# Altium PCB CardV1-ASCII.PcbDoc
Units mil, origin at the board's own origin, x right, y up, seen from the top; angles counter-clockwise.
Board outline 1590.03 x 1355.03 mil, 2 copper layers (Top Layer, Bottom Layer); 45 components, 56 nets, 174 pads, 11 vias.
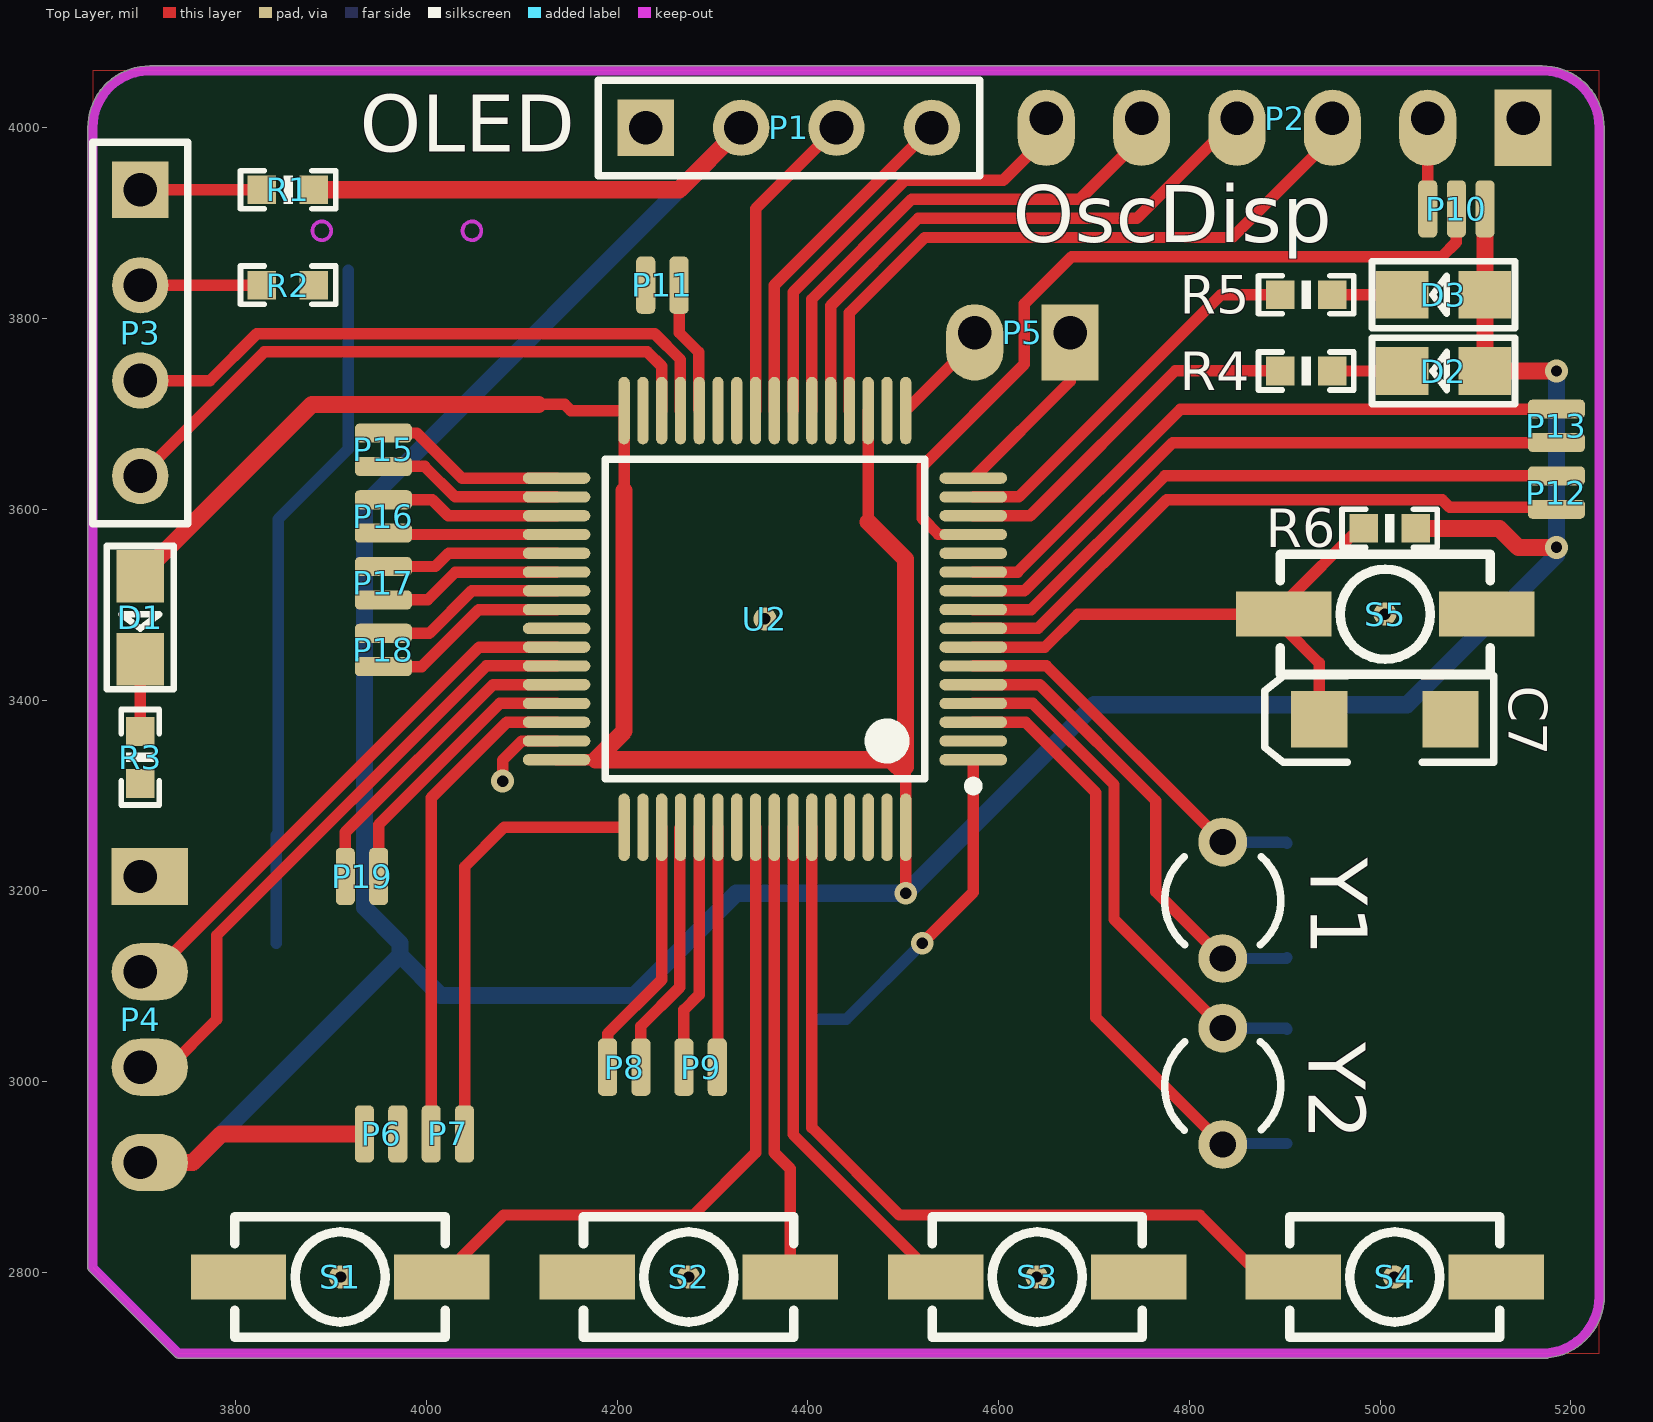
[diagram p0: Top Layer view]
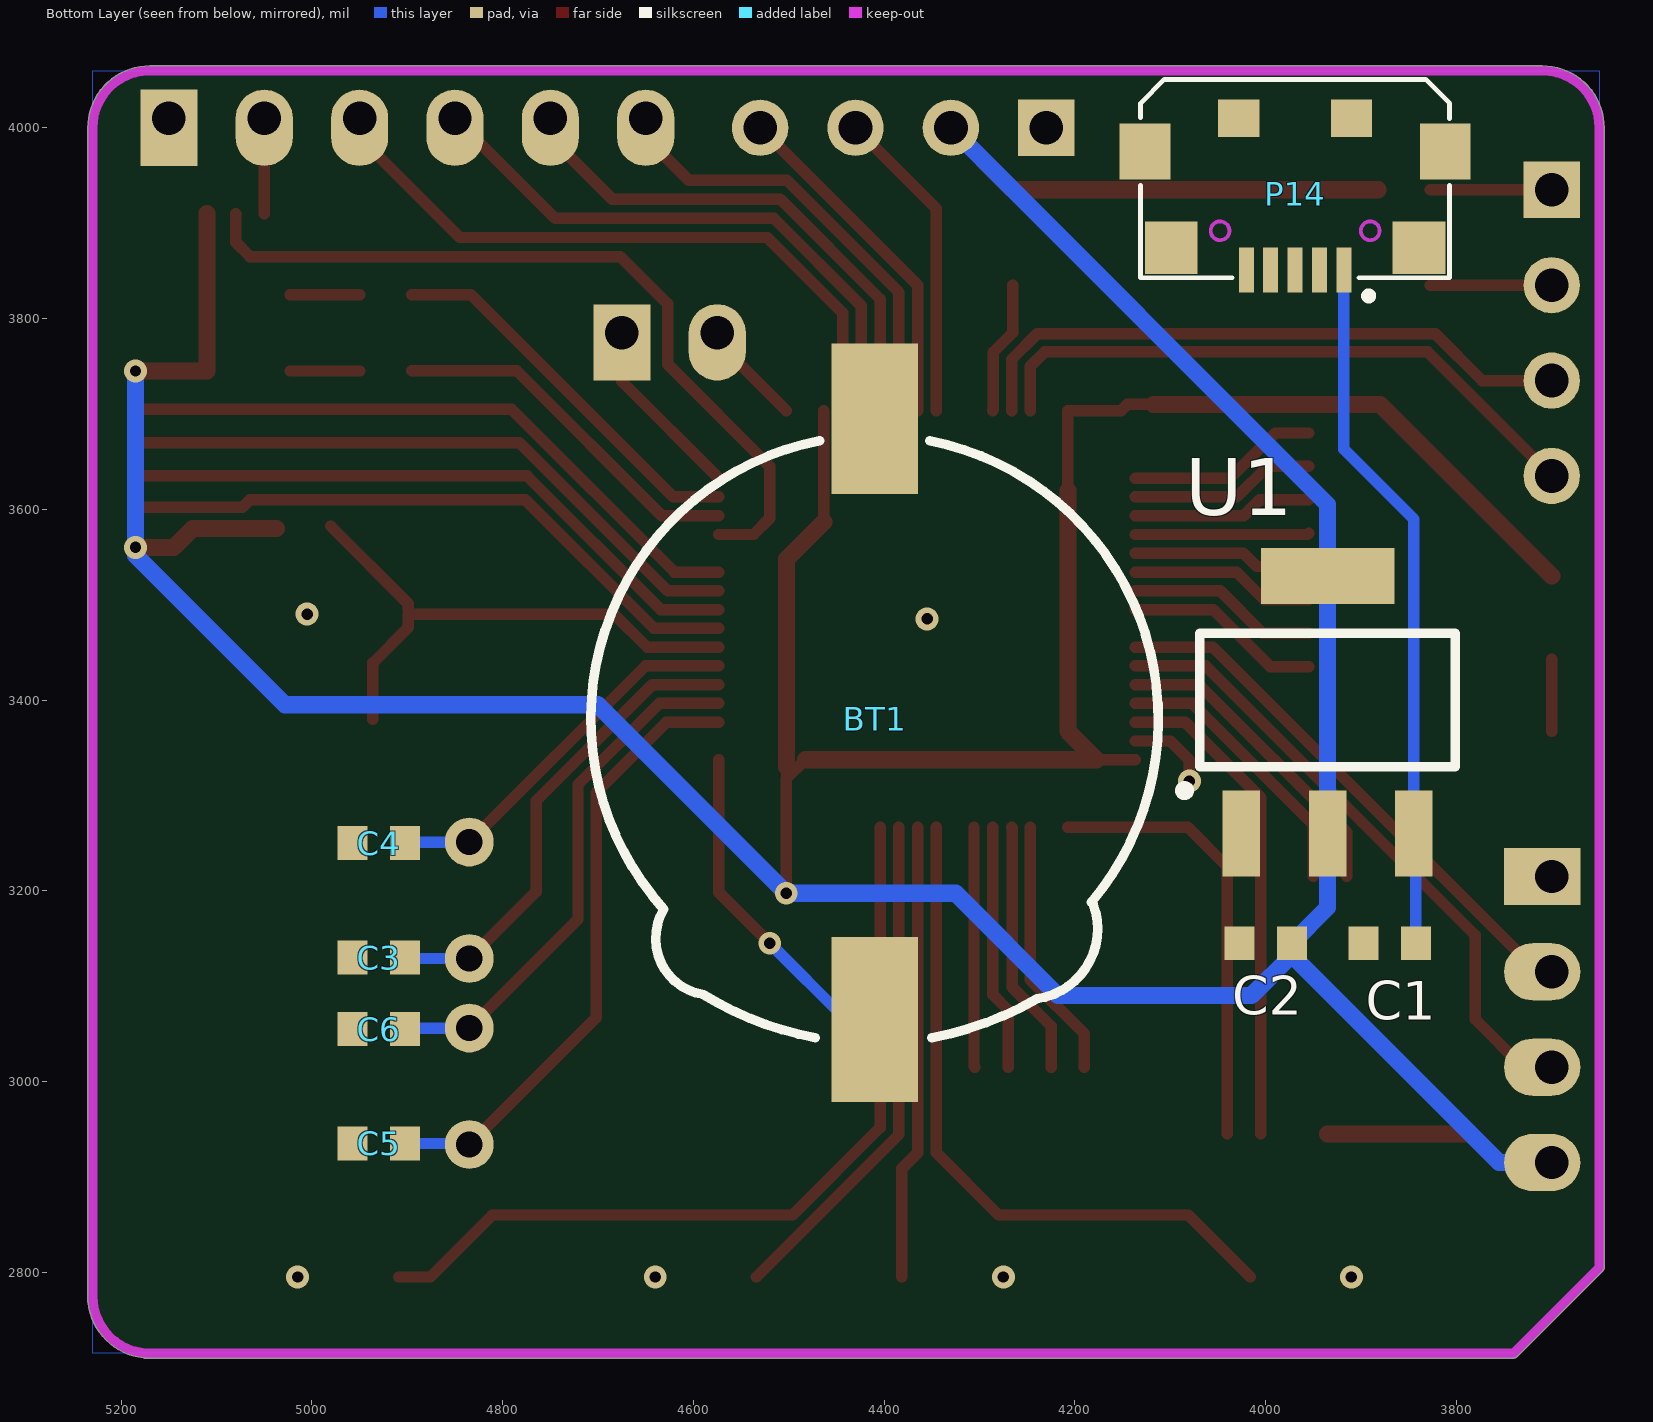
[diagram p1: Bottom Layer view, seen from below]

## Layer stack, top to bottom
Top Solder: solder mask 0.4, Solder Resist, Dk 3.5
Top Layer: signal copper 1.4
Dielectric 1: dielectric 12.6, FR-4, Dk 4.8
Bottom Layer: signal copper 1.4
Bottom Solder: solder mask 0.4, Solder Resist, Dk 3.5

## Board outline
3646.47,2801.44 cw(c3650,2805) 3644.99,2805 3644.99,4000 cw(c3710,4000) 3710,4065.01 5170,4065.01 cw(c5170,4000) 5235.02,4000 5235.02,2770 cw(c5230,2770) 5234.65,2768.12 cw(c5170,2775) 5176.88,2710.35 cw(c5175,2715) 5175,2709.99 3740,2709.99 cw(c3740,2715) 3736.44,2711.47 3736.45,2711.45

## Design rules (kind name [scope] priority, off if disabled: settings)
AssemblyTestPointUsage [All] p0: scope1count=1 scope1_0_kind=Board scope1_0_value=Board scope2count=1 scope2_0_kind=Board scope2_0_value=Board commentlength=0
AssemblyTestpoint [All] p0: scope1count=1 scope1_0_kind=Board scope1_0_value=Board scope2count=1 scope2_0_kind=Board scope2_0_value=Board commentlength=0
Clearance [All] p0: scope1count=1 scope1_0_kind=Board scope1_0_value=Board scope2count=1 scope2_0_kind=Board scope2_0_value=Board commentlength=0 gap=7
Clearance [All] p1: gap=7 ignorepadtopadclearanceinfootprint=FALSE
ComponentClearance [All] p0: scope1count=1 scope1_0_kind=Board scope1_0_value=Board scope2count=1 scope2_0_kind=Board scope2_0_value=Board commentlength=0 gap=10 collisioncheckmode=3
DiffPairsRouting [All] p0: scope1count=1 scope1_0_kind=Board scope1_0_value=Board scope2count=1 scope2_0_kind=Board scope2_0_value=Board commentlength=0
FabricationTestPointUsage [All] p0: scope1count=1 scope1_0_kind=Board scope1_0_value=Board scope2count=1 scope2_0_kind=Board scope2_0_value=Board commentlength=0 valid=0 allowmultiple=FALSE
FabricationTestpoint [All] p0: scope1count=1 scope1_0_kind=Board scope1_0_value=Board scope2count=1 scope2_0_kind=Board scope2_0_value=Board commentlength=0 side=3 testpointundercomponent=TRUE minsize=40 maxsize=100 preferedsize=60 minholesize=0 maxholesize=40 preferedholesize=32 testpointgrid=1
FanoutControl Fanout_Default [All] p0: scope1count=1 scope1_0_kind=Board scope1_0_value=Board scope2count=1 scope2_0_kind=Board scope2_0_value=Board commentlength=30 // Fanout_Default (Default Rule)
FanoutControl Fanout_Small [All] p0 off: scope1count=1 scope1_0_kind=Board scope1_0_value=Board scope2count=1 scope2_0_kind=Board scope2_0_value=Board commentlength=84 // Protel DXP Scope 1 Expression Was: (CompPinCount < 5)   Fanout_Small (Default Rule)
FanoutControl Fanout_SOIC [All] p0 off: scope1count=1 scope1_0_kind=Board scope1_0_value=Board scope2count=1 scope2_0_kind=Board scope2_0_value=Board commentlength=71 // Protel DXP Scope 1 Expression Was: IsSOIC   Fanout_SOIC (Default Rule)
FanoutControl Fanout_LCC [All] p0 off: scope1count=1 scope1_0_kind=Board scope1_0_value=Board scope2count=1 scope2_0_kind=Board scope2_0_value=Board commentlength=69 // Protel DXP Scope 1 Expression Was: IsLCC   Fanout_LCC (Default Rule)
FanoutControl Fanout_BGA [All] p0 off: scope1count=1 scope1_0_kind=Board scope1_0_value=Board scope2count=1 scope2_0_kind=Board scope2_0_value=Board commentlength=69 // Protel DXP Scope 1 Expression Was: IsBGA   Fanout_BGA (Default Rule)
Height [All] p0: scope1count=1 scope1_0_kind=Board scope1_0_value=Board scope2count=1 scope2_0_kind=Board scope2_0_value=Board commentlength=0
HoleSize [All] p0: scope1count=1 scope1_0_kind=Board scope1_0_value=Board scope2count=1 scope2_0_kind=Board scope2_0_value=Board commentlength=0 absolutevalues=TRUE maxlimit=100 minlimit=1 maxpercent=80.000 minpercent=20.000
HoleToHoleClearance [All] p0: scope1count=1 scope1_0_kind=Board scope1_0_value=Board scope2count=1 scope2_0_kind=Board scope2_0_value=Board commentlength=0
HoleToHoleClearance [All] p1: gap=7 allowstackedmicrovias=TRUE
LayerPairs [All] p0: scope1count=1 scope1_0_kind=Board scope1_0_value=Board scope2count=1 scope2_0_kind=Board scope2_0_value=Board commentlength=0 enforce=TRUE
MinimumSolderMaskSliver [All] p0: scope1count=1 scope1_0_kind=Board scope1_0_value=Board scope2count=1 scope2_0_kind=Board scope2_0_value=Board commentlength=0
MinimumSolderMaskSliver [All] p1: minsoldermaskwidth=7
NetAntennae [All] p0: scope1count=1 scope1_0_kind=Board scope1_0_value=Board scope2count=1 scope2_0_kind=Board scope2_0_value=Board commentlength=0
PasteMaskExpansion [All] p0: scope1count=1 scope1_0_kind=Board scope1_0_value=Board scope2count=1 scope2_0_kind=Board scope2_0_value=Board commentlength=0 expansion=0
PlaneClearance [All] p0: scope1count=1 scope1_0_kind=Board scope1_0_value=Board scope2count=1 scope2_0_kind=Board scope2_0_value=Board commentlength=0 clearance=20
PlaneConnect [All] p0: scope1count=1 scope1_0_kind=Board scope1_0_value=Board scope2count=1 scope2_0_kind=Board scope2_0_value=Board commentlength=0 planeconnectstyle=Relief reliefexpansion=20 reliefentries=4 reliefconductorwidth=10 reliefairgap=10
PolygonConnect [All] p0: scope1count=1 scope1_0_kind=Board scope1_0_value=Board scope2count=1 scope2_0_kind=Board scope2_0_value=Board commentlength=0 connectstyle=Relief reliefconductorwidth=10 reliefentries=4 polygonreliefangle="90 Angle"
PolygonConnect [All] p1: connectstyle=Relief reliefconductorwidth=10 reliefentries=4 polygonreliefangle="90 Angle" airgapwidth=10
RoutingCorners [All] p0: scope1count=1 scope1_0_kind=Board scope1_0_value=Board scope2count=1 scope2_0_kind=Board scope2_0_value=Board commentlength=0 cornerstyle=45-Degree minsetback=100 maxsetback=100
RoutingLayers [All] p0: scope1count=1 scope1_0_kind=Board scope1_0_value=Board scope2count=1 scope2_0_kind=Board scope2_0_value=Board commentlength=0 top layer=Automatic bottom layer=Automatic
RoutingPriority [All] p0: scope1count=1 scope1_0_kind=Board scope1_0_value=Board scope2count=1 scope2_0_kind=Board scope2_0_value=Board commentlength=0
RoutingTopology [All] p0: scope1count=1 scope1_0_kind=Board scope1_0_value=Board scope2count=1 scope2_0_kind=Board scope2_0_value=Board commentlength=0 topology=Shortest
RoutingVias [All] p0: scope1count=1 scope1_0_kind=Board scope1_0_value=Board scope2count=1 scope2_0_kind=Board scope2_0_value=Board commentlength=0 holewidth=12 width=24 viastyle="Through Hole" minholewidth=7 minwidth=18 maxholewidth=15 maxwidth=30
RoutingVias [All] p1: holewidth=12 width=24 viastyle="Through Hole" minholewidth=7 minwidth=18 maxholewidth=15 maxwidth=30
ShortCircuit [All] p0: scope1count=1 scope1_0_kind=Board scope1_0_value=Board scope2count=1 scope2_0_kind=Board scope2_0_value=Board commentlength=0 allowed=FALSE
SilkToBoardRegionClearance [All] p0: scope1count=1 scope1_0_kind=Board scope1_0_value=Board scope2count=1 scope2_0_kind=Board scope2_0_value=Board commentlength=0
SilkToSilkClearance [All] p0: scope1count=1 scope1_0_kind=Board scope1_0_value=Board scope2count=1 scope2_0_kind=Board scope2_0_value=Board commentlength=0
SilkToSilkClearance [All] p1: silktosilkclearance=0
SilkToSolderMaskClearance [All] p0 off: scope1count=1 scope1_0_kind=Board scope1_0_value=Board scope2count=1 scope2_0_kind=Board scope2_0_value=Board commentlength=44 // Protel DXP Scope 1 Expression Was: IsPad
SilkToSolderMaskClearance [IsPad] p1: minsilkscreentomaskgap=0 clearancetoexposedcopper=TRUE
SolderMaskExpansion [All] p0: scope1count=1 scope1_0_kind=Board scope1_0_value=Board scope2count=1 scope2_0_kind=Board scope2_0_value=Board commentlength=0 expansion=4
SolderMaskExpansion [All] p1: expansion=4
UnRoutedNet [All] p0: scope1count=1 scope1_0_kind=Board scope1_0_value=Board scope2count=1 scope2_0_kind=Board scope2_0_value=Board commentlength=0
UnpouredPolygon [All] p0: scope1count=1 scope1_0_kind=Board scope1_0_value=Board scope2count=1 scope2_0_kind=Board scope2_0_value=Board commentlength=0
Width [All] p0: scope1count=1 scope1_0_kind=Board scope1_0_value=Board scope2count=1 scope2_0_kind=Board scope2_0_value=Board commentlength=0 maxlimit=20 minlimit=7 preferedwidth=12
Width [All] p1: maxlimit=20 minlimit=7 preferedwidth=12
26 further rules are at their usual default settings.

## Components (designator, comment, footprint, x,y, rotation, side; value= is the part's Value field where it differs from the comment)
BT1 "Battery" Battery-OneSide 4410,3380 r270 bottom
C1 "100u" 1608[0603] 3870,3145 r180 bottom
C2 "100u" 1608[0603] 4000,3145 r180 bottom
C3 "22" 1608[0603] 4930,3130 r0 bottom
C4 "22" 1608[0603] 4930,3250 r180 bottom
C5 "22" 1608[0603] 4930,2935 r0 bottom
C6 "22" 1608[0603] 4930,3055 r0 bottom
C7 "104" 3.2X1.6X1.1 5005,3380 r180 top
D1 "LED0" SMDLED 3700,3530 r270 top
D2 "LED1" SMDLED 5110.03,3744.94 r180 top
D3 "LED2" SMDLED 5110.03,3824.94 r180 top
P1 "OLED" HDR1X4 4230,4000 r0 top
P2 "OscDisp" POSTAGE6 5150,4010 r180 top
P3 "Header 4" HDR1X4 3700,3935 r270 top
P4 "USART1" POSTAGE4 3700,3215 r270 top
P5 "USART2" POSTAGE2 4675,3785 r180 top
P6 "Boot" Switch2 3970,2945 r180 top
P7 "Boot" Switch2 4005,2945 r0 top
P8 "Boot" Switch2 4190,3015 r0 top
P9 "Boot" Switch2 4270,3015 r0 top
P10 "VrefCon" SWITCH3 5080,3915 r0 top
P11 "Boot" SWITCH2 4265,3835 r180 top
P12 "Boot" Switch2 5185,3600 r90 top
P13 "Boot" Switch2 5185,3670 r90 top
P14 "MICRO-USB" MICRO_USB5P_SOP 3969.05,3850.71 r180 bottom
P15 "Boot" Switch2 3955,3680 r270 top
P16 "Boot" Switch2 3955,3610 r270 top
P17 "Boot" Switch2 3955,3540 r270 top
P18 "Boot" Switch2 3955,3470 r270 top
P19 "Boot" Switch2 3915,3215 r0 top
R1 "0" 0603P 3855,3935 r180 top
R2 "0" 0603P 3855,3835 r180 top
R3 "330" 0603P 3700,3340 r270 top
R4 "330" 0603P 4922.5,3745.06 r0 top
R5 "330" 0603P 4922.5,3825 r0 top
R6 "10K" 0603P 5010,3580 r0 top
S1 "SW0" KEY 3910,2795 r0 top
S2 "SW1" KEY 4275.47,2795 r0 top
S3 "SW2" KEY 4640,2795 r180 top
S4 "SW3" KEY 5015,2795 r180 top
S5 "Reset" Key 5005,3490 r180 top
U1 "1117B" SOP-223 3935,3530 r180 bottom
U2 "STM32F103RBT6" LQFP64_N 4355,3485 r180 top
Y1 "8M" R38 4835,3190 r0 top
Y2 "32.768K" R38 4835,2995 r180 top

## Footprints (in the part's own frame and the unit in brackets; to place one, negate y for a bottom-side part, rotate by r counter-clockwise, add the part's x,y. Pads: shape width x height; smd on the part's side, far side on the other; paste and mask are expansions set on the pad)
3.2X1.6X1.1 [mm] "SMT LED; 2 Flat Leads"
  rect 1.5x1.5 smd: 1(-1.75,0) 2(1.75,0)
  silkscreen extent -2.9,-1.15 3.2,1.15
0603P [mil]
  rect 30x30 smd: 1(-27,0) 2(27.5,-0.06)
  silkscreen extent -50,-20 50,20
1608[0603] [mm] "Chip Capacitor, Body 1.6x0.8mm, IPC High Density"
  rect 0.8x0.9 smd: 1(-0.7,0) 2(0.7,0)
Battery-OneSide [mm]
  rect 4.4x2.3 smd: 1(8,0)
  rect 4x2.3 smd: 2(-8,0)
  silkscreen extent -7.41,-7.56 8.48,7.56
HDR1X4 [mm] "Connector; Header; 4 Position"
  rect 1.5x1.5 hole 0.9: 1(0,0)
  round 1.5 hole 0.9: 2(2.54,0) 3(5.08,0) 4(7.62,0)
  silkscreen extent -1.27,-1.27 8.89,1.27
KEY [mil]
  rect 100x47.24 smd: 1(-106.95,0) 2(106.03,0)
  silkscreen extent -111,-63 110,63
Key [mil]
  rect 100x47.24 smd: 1(-106.96,0) 2(106.02,0)
  silkscreen extent -111,-63 110,63
LQFP64_N [mm] "Thin QFP, 64-Leads, Body 10x10mm, Pitch 0.5mm, IPC Medium Density"
  oval 1.8x0.3 smd: 1(-5.55,3.75) 2(-5.55,3.25) 3(-5.55,2.75) 4(-5.55,2.25) 5(-5.55,1.75) 6(-5.55,1.25) 7(-5.55,0.75) 8(-5.55,0.25) 9(-5.55,-0.25) 10(-5.55,-0.75) 11(-5.55,-1.25) 12(-5.55,-1.75) 13(-5.55,-2.25) 14(-5.55,-2.75) 15(-5.55,-3.25) 16(-5.55,-3.75) 33(5.55,-3.75) 34(5.55,-3.25) 35(5.55,-2.75) 36(5.55,-2.25) 37(5.55,-1.75) 38(5.55,-1.25) 39(5.55,-0.75) 40(5.55,-0.25) 41(5.55,0.25) 42(5.55,0.75) 43(5.55,1.25) 44(5.55,1.75) 45(5.55,2.25) 46(5.55,2.75) 47(5.55,3.25) 48(5.55,3.75)
  oval 0.3x1.8 smd: 17(-3.75,-5.55) 18(-3.25,-5.55) 19(-2.75,-5.55) 20(-2.25,-5.55) 21(-1.75,-5.55) 22(-1.25,-5.55) 23(-0.75,-5.55) 24(-0.25,-5.55) 25(0.25,-5.55) 26(0.75,-5.55) 27(1.25,-5.55) 28(1.75,-5.55) 29(2.25,-5.55) 30(2.75,-5.55) 31(3.25,-5.55) 32(3.75,-5.55) 49(3.75,5.55) 50(3.25,5.55) 51(2.75,5.55) 52(2.25,5.55) 53(1.75,5.55) 54(1.25,5.55) 55(0.75,5.55) 56(0.25,5.55) 57(-0.25,5.55) 58(-0.75,5.55) 59(-1.25,5.55) 60(-1.75,5.55) 61(-2.25,5.55) 62(-2.75,5.55) 63(-3.25,5.55) 64(-3.75,5.55)
  silkscreen extent -5.68,-4.25 4.25,4.57
MICRO_USB5P_SOP [mm]
  rect 1.35x1.5 smd: 0(-4,3.16) 0(4,3.16)
  rect 1.4x1.4 smd: 0(-3.3,0.6) 0(3.3,0.6)
  rect 1.1x1 smd: 0(-1.5,4.046) 0(1.5,4.046)
  rect 0.4x1.2 smd: 1(1.3,0) 2(0.65,0) 3(0,0) 4(-0.65,0) 5(-1.3,0)
  Keep-Out Layer circle w0.1: c2,1.05 r0.25
  Keep-Out Layer circle w0.1: c-2,1.05 r0.25
  silkscreen extent -4.11,-0.79 4.11,5.08
POSTAGE2 [mil]
  rect 60x80 hole 35 copper offset 0,10: 1(0,0)
  oval 60x80 hole 35 copper offset 0,10: 2(100,0)
POSTAGE4 [mil]
  rect 60x80 hole 35 copper offset 0,10: 1(0,0)
  oval 60x80 hole 35 copper offset 0,10: 2(100,0) 3(200,0) 4(300,0)
POSTAGE6 [mil]
  rect 60x80 hole 35 copper offset 0,10: 1(0,0)
  oval 60x80 hole 35 copper offset 0,10: 2(100,0) 3(200,0) 4(300,0) 5(400,0) 6(500,0)
R38 [mm] "Crystal, Thru-Hole; 2 Leads; Body 3.1 x 8.2 mm (Dia.xH)"
  round 1.3 hole 0.7: 1(0,1.55) 2(0,-1.55)
  silkscreen extent -1.55,-1.19 1.55,1.17
SMDLED [mm]
  rect 1.4x1.27 smd: 1(0.001,-0.002) 2(2.211,-0.002)
  silkscreen extent -0.8,-0.89 3.01,0.89
SOP-223 [mil]
  rect 39.37x90 smd: 1(-90.55,-270) 2(0,-270) 3(90.55,-270)
  rect 140x59.06 smd: 2(0,0)
  silkscreen extent -155,-230 134,-60
Switch2 [mil]
  rrect50% 20x60 smd: 1(0,0) 2(35,0)
SWITCH2 [mil]
  rrect50% 20x60 smd: 1(0,0) 2(35,0)
SWITCH3 [mil]
  rrect50% 20x60 smd: 1(-30,0) 2(0,0) 3(30,0)

## Part data
BT1: "Multicell Battery"
C1 C2 C3 C4 C5 C6 C7: library part Cap, "Capacitor"
D1: "Typical INFRARED GaAs LED"
D2 D3: library part LED0, "Typical INFRARED GaAs LED"
P1 P4: library part "Header 4", "Header, 4-Pin"
P2: library part "Header 6", "Header, 6-Pin"
P3: "Header, 4-Pin"
P5 P6 P7 P8 P9 P11 P12 P13 P15 P16 P17 P18 P19: library part "Header 2", "Header, 2-Pin"
P10: library part "Header 3", "Header, 3-Pin"
P14: library part USB5
R1 R2 R3 R4 R5 R6: library part Res1, "Resistor"
S1 S2 S3 S4 S5: library part SW-PB, "Switch"
U2: "STM32 ARM-based 32-bit MCU with 128 Kbytes Flash, 64-pin LQFP, Industrial Temperature"
Y1 Y2: library part XTAL, "Crystal Oscillator"

## Via types
v1: diameter 24, hole 12, Top Layer to Bottom Layer, 11 vias

## Nets (pads, with @x,y where several pads share a name; then routed paths per layer and width w, separated by ;. In a path a pad name is that pad's centre, name@x,y a point inside that pad or via, vN(x,y) a via of type N, cw(c..) or ccw(c..) an arc to the next point about the centre after c; other vN are vias at no path point)
ADC_X: P2.6 U2.23 | length 476.9
  Top Layer w12: U2.23 4384.53,3827.66 4501.87,3945 4605,3945 4650,3990 P2.6
ADC_Y: P2.5 U2.22 | length 553
  Top Layer w12: U2.22 4404.21,3820.47 4508.74,3925 4685,3925 4750,3990 P2.5
ADS_CS: P17.1 U2.37 | length 187.3
  Top Layer w12: P17.1 4009.39,3540 4023.29,3553.9 U2.37
ADS_RDY: P15.1 U2.33 | length 201.1
  Top Layer w12: P15.1 3990,3680 4037.36,3632.64 U2.33
ADS_RST: P17.2 U2.38 | length 193.6
  Top Layer w12: P17.2 4001.26,3505 4030.47,3534.21 U2.38
CAN_RX: P19.1 U2.44 | length 331.9
  Top Layer w12: P19.1 3915,3261.26 4069.84,3416.1 U2.44
CAN_TX: P19.2 U2.45 | length 293.5
  Top Layer w12: P19.2 3950,3269.39 4077.03,3396.42 U2.45
DAC_X: P2.4 U2.21 | length 625.2
  Top Layer w12: U2.21@4423.99,3695.63 4423.99,3813.38 4515.61,3905 4745,3905 P2.4
DAC_Y: P2.3 U2.20 | length 705.2
  Top Layer w12: U2.20 4443.58,3806.1 4522.48,3885 4845,3885 4950,3990 P2.3
DGND1: P3.2 R2.2 | length 127.5
  Top Layer w12: P3.2 3827.44,3835 R2.2
DVCC1: P3.1 R1.2 | length 127.5
  Top Layer w12: P3.1 3827.44,3935 R1.2
GND: BT1.2 C1.1 C2.1 C3.2 C4.1 C5.2 C6.2 C7.1 P1.1 P2.1 P4.1 P6.1 P11.2 P14.0@3811.57,3975.12 P14.0@4126.53,3975.12 P14.5 R2.1 R3.2 S1.1 S2.1 S3.1 S4.1 S5.1 U1.1 U2.12 U2.18 U2.31 U2.47 U2.60 U2.63 | length 86.9
  Top Layer w12: v1(4080,3315) 4080,3337.13 4099.92,3357.05 U2.47
  other v1: 3910,2795 4275,2795 4640,2795 5015,2795 4355,3485 5005,3490
LED1: R4.1 U2.14 | length 384.9
  Top Layer w12: U2.14 4633.27,3593.27 4785.06,3745.06 R4.1
LED2: R5.1 U2.15 | length 409.8
  Top Layer w12: U2.15 4621.16,3612.95 4833.2,3825 R5.1
NetBT1_1: BT1.1 U2.1 | length 357.6
  Top Layer w12: v1(4520,3145) 4573.5,3198.5 U2.1
  Bottom Layer w12: BT1.1 4440.04,3065.04 v1(4520,3145)
NetC5_1: C5.1 U2.3 Y2.1 | length 651
  Top Layer w12: U2.3 4628.27,3376.73 4702,3303 4702,3066.98 Y2.1
  Bottom Layer w12: Y2.1 4836.02,2935 C5.1
NetC6_1: C6.1 U2.4 Y2.2 | length 553.1
  Top Layer w12: U2.4 4635.87,3396.42 4721,3311.28 4721,3170.02 Y2.2
  Bottom Layer w12: Y2.2 4901.42,3056.02 C6.1
NetD1_2: D1.2 R3.1 | length 76
  Top Layer w12: D1.2 3700,3442.9 R3.1
NetD2_2: D2.2 R4.2 | length 73
  Top Layer w12: R4.2 D2.2
NetD3_2: D3.2 R5.2 | length 73
  Top Layer w12: R5.2 5022.93,3824.94 D3.2
NetP10_2: P10.2 U2.13 | length 839.5
  Top Layer w12: U2.13 4536.93,3573.58 4520,3590.51 4520,3645 4627,3752 4627,3815.38 4676.62,3865 5065,3865 5080,3880 P10.2@5080,3910
NetP11_1: P11.1 U2.28 | length 140.2
  Top Layer w12: P11.1 4265,3785.34 4285.42,3764.92 4285.42,3704.19 U2.28
OLED_CLK: P1.3 U2.25 | length 331.6
  Top Layer w12: U2.25 4345.16,3915.16 P1.3
OLED_SDA: P1.4 U2.24 | length 364.9
  Top Layer w12: U2.24 4364.84,3834.84 P1.4
OneWire: U2.2
OSC_N: C4.2 U2.6 Y1.1 | length 405.9
  Top Layer w12: U2.6 4650.24,3435.79 Y1.1
  Bottom Layer w12: Y1.1 4901.42,3251.02 C4.2
OSC_P: C3.1 U2.5 Y1.2 | length 504
  Top Layer w12: U2.5 4643.05,3416.1 4765,3294.15 4765,3198.98 Y1.2
  Bottom Layer w12: Y1.2 4901.42,3128.98 C3.1
PC8: P18.1 U2.39 | length 199.9
  Top Layer w12: P18.1 4003.13,3470 4047.66,3514.53 U2.39
PC9: P18.2 U2.40 | length 206.3
  Top Layer w12: P18.2 3995,3435 4054.84,3494.84 U2.40
Reset: C7.2 R6.1 S5.2 U2.7 | length 586.4
  Top Layer w12: U2.7 4648.61,3455.47 4683.14,3490 S5.2 4898.98,3476.02 4936.1,3438.9 C7.2 ; S5.2@4898.98,3495 4898.98,3500.98 R6.1@4980.5,3582.5
RXD: P4.3 U2.43 | length 662.4
  Top Layer w12: P4.3 3730,3015 3780,3065 3780,3153.13 4062.66,3435.79 U2.43
RXD2: P5.2 U2.17 | length 111.5
  Top Layer w12: U2.17 4575,3775.87 P5.2
RXD3: P3.4 U2.30 | length 653.2
  Top Layer w12: P3.4 3830,3765 4231.6,3765 4246.73,3749.87 U2.30
RXD4: P8.2 U2.52 | length 268.7
  Top Layer w12: P8.2 4225,3058.13 4265.73,3098.86 4265.73,3265.81 U2.52
RXD5: P9.2 U2.54 | length 251.8
  Top Layer w12: P9.2 4305.79,3015.79 U2.54
SCLK: P7.2 U2.49 | length 464.6
  Top Layer w12: P7.2 4040,3225 4081.5,3266.5 U2.49
SDIO: P7.1 U2.46 | length 516.8
  Top Layer w12: P7.1 4005,3297.52 4084.21,3376.73 U2.46
SMB_SCL: P3.3 U2.29 | length 651.4
  Top Layer w12: P3.3 3773.13,3735 3822.13,3784 4239.47,3784 4266.42,3757.05 U2.29
SPI2_MISO: P16.1 U2.35 | length 188.4
  Top Layer w12: P16.1 4006.26,3610 4022.99,3593.27 U2.35
SPI2_MOSI: P16.2 U2.36 | length 182.1
  Top Layer w12: P16.2 3956.42,3573.58 U2.36
SPI2_SCK: P15.2 U2.34 | length 194.8
  Top Layer w12: P15.2 3998.13,3645 4030.18,3612.95 U2.34
SW0: S1.2 U2.56 | length 724.4
  Top Layer w12: S1.2 4081.03,2860 4280,2860 4345.16,2925.16 U2.56
SW1: S2.2 U2.57 | length 478.4
  Top Layer w12: U2.57 4364.84,2925.16 4381.49,2908.51 S2.2
SW2: S3.2 U2.58 | length 533.4
  Top Layer w12: U2.58 4384.53,2944.45 S3.2
SW3: S4.2 U2.59 | length 884.5
  Top Layer w12: U2.59 4404.21,2951.63 4495.85,2860 4810.71,2860 4875.71,2795 S4.2
TAo1: P12.2 U2.9 | length 669.6
  Top Layer w12: U2.9 4634.24,3494.84 4774.4,3635 P12.2
TAo2: P13.2 U2.11 | length 682.2
  Top Layer w12: U2.11 4619.87,3534.21 4790.66,3705 P13.2
Ton1: P12.1 U2.8 | length 671.5
  Top Layer w12: U2.8 4641.42,3475.16 4776.27,3610 5065,3610 5073.06,3601.94 5183.06,3601.94 P12.1
Ton2: P13.1 U2.10 | length 675.9
  Top Layer w12: U2.10 4627.05,3514.53 4782.53,3670 P13.1
TXD: P4.2 U2.42 | length 577.5
  Top Layer w12: P4.2 3715,3115 4055.47,3455.47 U2.42
TXD2: P5.1 U2.16 | length 194.4
  Top Layer w12: U2.16 4675,3734.13 P5.1
TXD4: P8.1 U2.51 | length 275
  Top Layer w12: P8.1 4190,3050 4246.73,3106.73 U2.51
TXD5: P9.1 U2.53 | length 258.2
  Top Layer w12: P9.1 4270,3075 4286.1,3091.1 U2.53
VCC: C2.2 D1.1 D2.1 D3.1 P1.2 P4.4 P6.2 P10.3 R1.1 R6.2 U1.2 U2.19 U2.32 U2.48 U2.64 | length 6001.7
  Top Layer w12: 4117.39,3710 4145,3710 4151.5,3703.5 U2.32 4207.36,3619.47 ; U2.48 4177.36,3337.36 ; 4463.27,3586.73 U2.19 ; 4482.64,3337.36 4502.39,3317.61 4502.39,3330 ; v1(4502.64,3197.36) U2.64 4502.64,3317.61
  Top Layer w18: D1.1 3879.97,3710 4117.39,3710 ; P4.4 3755,2915 3785,2945 P6.2 ; R1.1 4265,3935 P1.2 ; 4207.36,3619.47 4207.36,3367.36 4177.36,3337.36 4482.64,3337.36 ; 4463.27,3586.73 4502.39,3547.61 4502.39,3330 ; R6.2 5125.06,3579.94 5145,3560 v1(5185,3560) ; P10.3@5110,3910 D3.1 D2.1 v1(5185,3745)
  Bottom Layer w18: P4.4 3755,2915 3972.44,3132.44 C2.2@3972.44,3132.56 ; P1.2 3935,3605 3935,3530 3935,3260 3935,3182.44 C2.2 C2.2@3972.44,3132.56 ; v1(5185,3745) v1(5185,3560) 5185,3551.75 5028.25,3395 4700.28,3395 v1(4502.64,3197.36) 4325,3197.36 4217.64,3090 4015,3090 C2.2@3972.44,3132.56
Vin: C1.2 P14.1 U1.3 | length 737
  Bottom Layer w12: C1.2 3842.44,3257.99 U1.3 3844.45,3589.45 3917.87,3662.87 P14.1
Vref: P2.2 P10.1 | length 100
  Top Layer w12: P10.1@5050,3910 P10.1 P2.2
pads on no net: P14.0@3839.13,3874.33 P14.0@3910,4010 P14.0@4028.11,4010 P14.0@4098.98,3874.33 P14.2 P14.3 P14.4 U2.26 U2.27 U2.41 U2.50 U2.55 U2.61 U2.62

## Polygon pours and split planes (outlines as drawn)
GND on Top Layer "Top Layer-No Net" (solid, remove dead copper, pour order 0): 3650,2805 3740,2715 5230,2715 5230,4060 3650,4060
GND on Bottom Layer "GND_L02_P001" (solid, remove dead copper, pour order 1): 3650,2805 3740,2715 5230,2715 5230,4060 3650,4060

## Keep-outs
Keep-Out Layer:
  lines w10: 5170,2715 ccw(c5170,2775) 5230,2775 ; 5175,2715 3740,2715 3650,2805 3650,4000 cw(c3710,4000) 3710,4060 5170,4060 cw(c5170,4000) 5230,4000 5230,2770